# Altium PCB Board_QFP.PcbDoc (part 4 of 4)
Units mm, origin at the board's own origin, x right, y up, seen from the top; angles counter-clockwise.
Board outline 237 x 100 mm, 2 copper layers (Top Layer, Bottom Layer); 389 components, 358 nets, 1412 pads, 469 vias.
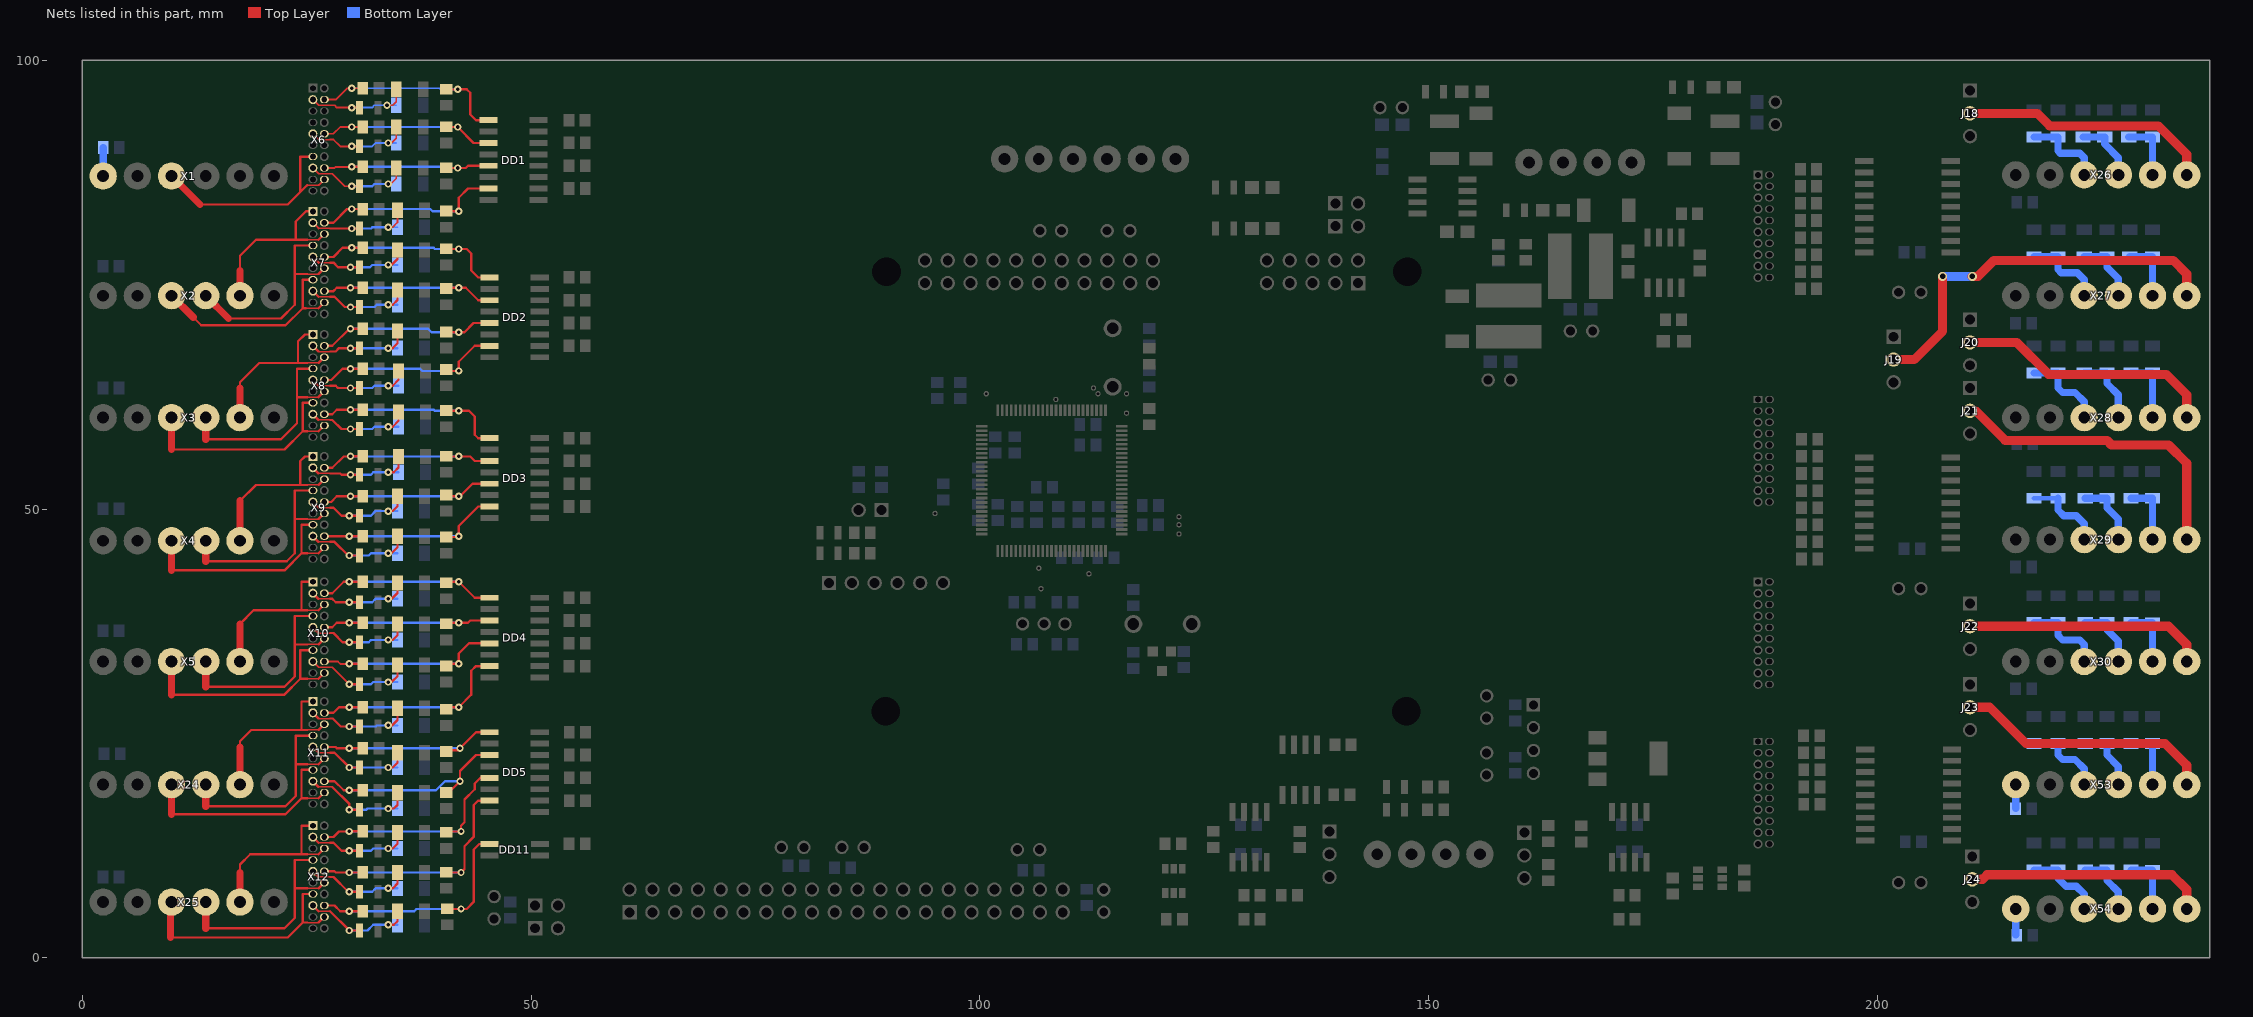
[diagram p4: the nets of this part, all layers, seen from the top]

## Via types
v1: diameter 0.6, hole 0.3, Top Layer to Bottom Layer, 149 vias
v2: diameter 0.813, hole 0.406, Top Layer to Bottom Layer, 130 vias
v3: diameter 1, hole 0.6, Top Layer to Bottom Layer, 118 vias
v4: diameter 1.016, hole 0.61, Top Layer to Bottom Layer, 72 vias

## Nets (pads, with @x,y where several pads share a name; then routed paths per layer and width w, separated by ;. In a path a pad name is that pad's centre, name@x,y a point inside that pad or via, vN(x,y) a via of type N, cw(c..) or ccw(c..) an arc to the next point about the centre after c; other vN are vias at no path point) (continued)
x1-4: X1.4 X6.13 X6.18 | length 24.8
  Top Layer w0.152: 25.04,86.111 26.31,86.111
  Top Layer w0.203: 26.31,86.111 X6.18@26.945,86.746
  Top Layer w0.254: 13.102,83.952 22.881,83.952 24.278,85.349 ; 25.04,86.111 24.278,85.349 ; X6.13@25.675,89.286 24.278,89.286 24.278,85.349
  Top Layer w0.813: X1.4@9.927,87.127 13.102,83.952
x1-6: J1.2 X1.6 | length 3.2
  Bottom Layer w0.813: X1.6@2.31,87.13 J1.2@2.31,90.304
x2-2: X2.2 X7.1 X7.6 | length 19.3
  Top Layer w0.152: 25.04,80.015 26.31,80.015
  Top Layer w0.254: 17.547,76.586 17.547,78.237 19.325,80.015 23.77,80.015 ; 25.04,80.015 23.77,80.015 ; X7.1@25.675,83.19 24.913,83.19 23.77,82.047 23.77,80.015 ; 26.31,80.015 X7.6@26.945,80.65
  Top Layer w0.813: X2.2@17.547,73.792 17.547,76.586
x2-3: X2.3 X7.7 X7.12 | length 23.8
  Top Layer w0.152: 25.04,76.205 26.31,76.205
  Top Layer w0.254: 16.277,71.252 22.119,71.252 23.643,72.776 23.643,76.205 ; 25.04,76.205 23.643,76.205 ; X7.7@25.675,79.38 23.643,79.38 23.643,76.205 ; 26.31,76.205 X7.12@26.945,76.84
  Top Layer w0.813: X2.3@13.737,73.792 16.277,71.252
x2-4: X2.4 X7.13 X7.18 | length 23.8
  Top Layer w0.152: 24.913,72.395 26.31,72.395
  Top Layer w0.254: 12.34,71.379 13.229,70.49 22.627,70.49 24.532,72.395 ; 24.913,72.395 24.532,72.395 ; X7.13@25.675,75.57 24.532,75.57 24.532,72.395 ; 26.31,72.395 X7.18@26.945,73.03
  Top Layer w0.813: X2.4@9.927,73.792 12.34,71.379
x3-2: X3.2 X8.1 X8.6 | length 18.9
  Top Layer w0.152: 25.04,66.299 26.31,66.299
  Top Layer w0.254: 17.547,63.505 17.547,64.14 19.706,66.299 24.024,66.299 ; 25.04,66.299 24.024,66.299 ; X8.1@25.675,69.474 24.786,69.474 24.024,68.712 24.024,66.299 ; 26.31,66.299 X8.6@26.945,66.934
  Top Layer w0.813: X3.2@17.547,60.203 17.547,63.505
x3-3: X3.3 X8.7 X8.12 | length 24.5
  Top Layer w0.152: 25.04,62.489 26.31,62.489
  Top Layer w0.254: 13.737,57.79 22.119,57.79 23.897,59.568 23.897,62.489 ; 25.04,62.489 23.897,62.489 ; X8.7@25.675,65.664 23.897,65.664 23.897,62.489 ; 26.31,62.489 X8.12@26.945,63.124
  Top Layer w0.813: 13.737,57.79 X3.3@13.737,60.203
x3-4: X3.4 X8.13 X8.18 | length 26
  Top Layer w0.152: 25.04,58.679 26.31,58.679
  Top Layer w0.254: 9.927,56.647 22.5,56.647 24.532,58.679 ; 25.04,58.679 24.532,58.679 ; X8.13@25.675,61.854 24.532,61.854 24.532,58.679 ; 26.31,58.679 X8.18@26.945,59.314
  Top Layer w0.813: 9.927,56.647 X3.4@9.927,60.203
x4-2: X4.2 X9.1 X9.6 | length 19.1
  Top Layer w0.152: 25.04,52.71 26.31,52.71
  Top Layer w0.254: 17.547,50.932 19.325,52.71 24.278,52.71 ; 25.04,52.71 24.278,52.71 ; X9.1@25.675,55.885 24.786,55.885 24.278,55.377 24.278,52.71 ; 26.31,52.71 X9.6@26.945,53.345
  Top Layer w0.813: X4.2@17.547,46.487 17.547,50.932
x4-3: X4.3 X9.7 X9.12 | length 25.1
  Top Layer w0.152: 25.04,48.9 26.31,48.9
  Top Layer w0.254: 13.737,44.201 22.754,44.201 23.643,45.09 23.643,48.9 ; 25.04,48.9 23.643,48.9 ; X9.7@25.675,52.075 23.643,52.075 23.643,48.9 ; 26.31,48.9 X9.12@26.945,49.535
  Top Layer w0.813: 13.737,44.201 X4.3@13.737,46.487
x4-4: X4.4 X9.13 X9.18 | length 25.8
  Top Layer w0.152: 25.04,45.09 26.31,45.09
  Top Layer w0.254: 9.927,43.185 22.5,43.185 24.405,45.09 ; 25.04,45.09 24.405,45.09 ; X9.13@25.675,48.265 24.405,48.265 24.405,45.09 ; 26.31,45.09 X9.18@26.945,45.725
  Top Layer w0.813: 9.927,43.185 X4.4@9.927,46.487
x5-2: X5.2 X10.1 X10.6 | length 18.9
  Top Layer w0.152: 25.04,38.74 26.31,38.74
  Top Layer w0.254: 17.547,37.216 19.071,38.74 24.405,38.74 ; 25.04,38.74 24.405,38.74 ; X10.1@25.675,41.915 24.405,41.915 24.405,38.74 ; 26.31,38.74 X10.6@26.945,39.375
  Top Layer w0.813: X5.2@17.547,33.025 17.547,37.216
x5-3: X5.3 X10.7 X10.12 | length 25.5
  Top Layer w0.152: 25.04,34.93 26.31,34.93
  Top Layer w0.254: 13.737,30.231 22.5,30.231 23.643,31.374 23.643,34.93 ; 25.04,34.93 23.643,34.93 ; X10.7@25.675,38.105 23.643,38.105 23.643,34.93 ; 26.31,34.93 X10.12@26.945,35.565
  Top Layer w0.813: 13.737,30.231 X5.3@13.737,33.025
x5-4: X5.4 X10.13 X10.18 | length 26.3
  Top Layer w0.152: 25.04,31.12 26.31,31.12
  Top Layer w0.254: 9.927,29.342 22.5,29.342 24.278,31.12 ; 25.04,31.12 24.278,31.12 ; X10.13@25.675,34.295 24.278,34.295 24.278,31.12 ; 26.31,31.12 X10.18@26.945,31.755
  Top Layer w0.813: 9.927,29.342 X5.4@9.927,33.025
x6-3: R2.1 R3.1 VD1.1 X6.3 | length 13.4
  Top Layer w0.152: 26.31,95.001 27.58,95.001
  Top Layer w0.203: X6.3@25.675,95.636 26.31,95.001 ; 27.58,95.001 28.088,95.001 28.342,94.747 v2(29.993,94.747) VD1.1@30.882,94.747 VD1.1@31.009,94.747 ; v2(33.93,95.001) 34.565,95.001 34.97,95.406 R3.1@34.97,96.779
  Bottom Layer w0.203: v2(29.993,94.747) 32.279,94.747 32.533,95.001 v2(33.93,95.001) R2.1@34.97,95.001
x6-4: DD1.1 R1.1 R4.1 X6.4 | length 24.2
  Top Layer w0.203: X6.4@26.945,95.636 28.215,95.636 29.485,96.906 v2(29.993,96.906) 31.236,96.906 R1.1@31.238,96.908 ; R4.1@40.561,96.779 v2(41.804,96.779)
  Top Layer w0.254: v2(41.804,96.779) 42.82,96.779 43.201,96.398 43.201,93.985 43.836,93.35 DD1.1@45.233,93.35
  Bottom Layer w0.203: v2(29.993,96.906) 39.772,96.906 39.899,96.779 41.169,96.779 41.167,96.781 41.802,96.781 v2(41.804,96.779)
x7-3: R6.1 R7.1 VD2.1 X6.9 | length 13.4
  Top Layer w0.152: 26.31,91.191 27.58,91.191
  Top Layer w0.203: X6.9@25.675,91.826 26.31,91.191 ; 27.58,91.191 27.961,91.191 28.723,90.429 v2(29.993,90.429) VD2.1@30.882,90.429 ; VD2.1@30.882,90.556 VD2.1@31.009,90.556 ; v2(34.057,90.81) 34.438,90.81 34.97,91.342 R7.1@34.97,92.588
  Bottom Layer w0.203: v2(29.993,90.429) 32.279,90.429 32.66,90.81 v2(34.057,90.81) R6.1@34.97,90.81
x7-4: DD1.3 R5.1 R8.1 X6.10 | length 22
  Top Layer w0.203: X6.10@26.945,91.826 27.961,91.826 28.723,92.588 v2(29.993,92.588)
  Top Layer w0.254: v2(29.993,92.588) 31.236,92.588 R5.1@31.238,92.59 R5.1@31.365,92.59 ; R8.1@40.561,92.588 v2(41.804,92.588) 43.582,90.81 DD1.3@45.233,90.81
  Bottom Layer w0.254: v2(29.993,92.588) v2(41.804,92.588)
x8-3: R10.1 R11.1 VD3.1 X6.15 | length 12.6
  Top Layer w0.152: 26.31,87.381 27.58,87.381
  Top Layer w0.203: X6.15@25.675,88.016 26.31,87.381 ; 27.58,87.381 27.834,87.381 29.231,85.984 v2(29.993,85.984) VD3.1@30.882,85.984 ; v2(34.057,86.238) 34.359,86.238 34.97,86.849 R10.1@34.97,88.016
  Bottom Layer w0.254: v2(29.993,85.984) 32.279,85.984 32.533,86.238 v2(34.057,86.238)
x8-4: DD1.5 R9.1 R12.1 X6.16 | length 21
  Top Layer w0.203: X6.16@26.945,88.016 28.088,88.016 28.215,88.143 v2(29.993,88.143)
  Top Layer w0.254: v2(29.993,88.143) 29.995,88.145 R9.1@31.238,88.145 ; R12.1@40.561,88.016 v2(41.804,88.016) 42.693,88.016 42.947,88.27 DD1.5@45.233,88.27
  Bottom Layer w0.254: v2(29.993,88.143) 40.026,88.143 40.153,88.016 v2(41.804,88.016)
x9-3: R17.1 R18.1 VD4.1 X7.3 | length 13.3
  Top Layer w0.152: 26.31,81.285 27.58,81.285
  Top Layer w0.203: X7.3@25.675,81.92 26.31,81.285 ; v2(29.993,81.285) VD4.1@30.882,81.285 ; v2(34.057,81.412) 34.565,81.412 35.097,81.944 R17.1@35.097,83.317
  Top Layer w0.254: 27.58,81.285 v2(29.993,81.285)
  Bottom Layer w0.203: v2(34.057,81.412) R18.1@35.097,81.412
  Bottom Layer w0.254: v2(29.993,81.285) 32.152,81.285 32.279,81.412 v2(34.057,81.412)
x9-4: DD1.7 R16.1 R19.1 X7.4 | length 23.6
  Top Layer w0.254: X7.4@26.945,81.92 27.961,81.92 29.485,83.444 v2(29.993,83.444) 29.995,83.446 R16.1@31.238,83.446 ; R19.1@40.561,83.19 v2(41.931,83.19) 41.931,84.714 42.947,85.73 DD1.7@45.233,85.73
  Bottom Layer w0.254: v2(29.993,83.444) 38.756,83.444 39.01,83.19 v2(41.931,83.19)
x10-3: R21.1 R22.1 VD5.1 X7.9 | length 13.3
  Top Layer w0.152: 26.31,77.475 27.58,77.475
  Top Layer w0.254: X7.9@25.675,78.11 26.31,77.475 ; 27.58,77.475 27.961,77.475 28.469,76.967 v2(29.866,76.967) VD5.1@30.882,76.967 ; v2(34.057,77.221) 34.438,77.221 35.097,77.88 R21.1@35.097,78.872
  Bottom Layer w0.254: v2(29.866,76.967) 32.025,76.967 32.279,77.221 v2(34.057,77.221) R22.1@35.097,77.221
x10-4: DD2.1 R20.1 R23.1 X7.10 | length 23.9
  Top Layer w0.203: R23.1@40.561,78.999 v2(41.931,78.999)
  Top Layer w0.254: X7.10@26.945,78.11 27.961,78.11 28.977,79.126 v2(29.993,79.126) 29.995,79.128 R20.1@31.238,79.128 ; v2(41.931,78.999) 42.82,78.999 43.328,78.491 43.328,76.586 44.09,75.824 DD2.1@45.36,75.824
  Bottom Layer w0.254: v2(29.993,79.126) 39.137,79.126 39.264,78.999 v2(41.931,78.999)
x11-3: R25.1 R26.1 VD6.1 X7.15 | length 13.7
  Top Layer w0.152: 26.31,73.665 27.58,73.665
  Top Layer w0.254: X7.15@25.675,74.3 26.31,73.665 ; 27.58,73.665 28.088,73.665 29.231,72.522 v2(29.866,72.522) VD6.1@30.882,72.522 ; v2(34.057,72.776) 34.565,72.776 35.097,73.308 R25.1@35.097,74.427
  Bottom Layer w0.254: v2(29.866,72.522) 32.533,72.522 32.787,72.776 v2(34.057,72.776) R26.1@35.097,72.776
x11-4: DD2.3 R24.1 R27.1 X7.16 | length 22
  Top Layer w0.254: X7.16@26.945,74.3 27.961,74.3 28.342,74.681 v2(29.866,74.681) 29.868,74.683 R24.1@31.238,74.683 ; R27.1@40.536,74.579 40.638,74.681 v2(41.931,74.681) 42.693,74.681 44.09,73.284 DD2.3@45.36,73.284
  Bottom Layer w0.254: v2(29.866,74.681) v2(41.931,74.681)
x12-3: R32.1 R33.1 VD7.1 X8.3 | length 13.5
  Top Layer w0.152: 26.31,67.569 27.58,67.569
  Top Layer w0.254: X8.3@25.675,68.204 26.31,67.569 ; 27.58,67.569 28.215,67.569 28.596,67.95 v2(29.866,67.95) VD7.1@30.882,67.95 ; v2(34.057,67.95) 34.565,67.95 35.097,68.482 R32.1@35.097,69.855
  Bottom Layer w0.254: v2(29.866,67.95) v2(34.057,67.95) R33.1@35.097,67.95
x12-4: DD2.5 R31.1 R34.1 X8.4 | length 22.5
  Top Layer w0.254: X8.4@26.945,68.204 27.834,68.204 29.739,70.109 v2(29.866,70.109) 29.868,70.111 R31.1@31.238,70.111 ; R34.1@40.561,69.728 v2(41.931,69.728) 42.566,69.728 43.582,70.744 DD2.5@45.36,70.744
  Bottom Layer w0.254: v2(29.866,70.109) 38.502,70.109 38.883,69.728 v2(41.931,69.728)
x13-3: R36.1 R37.1 VD8.1 X8.9 | length 13.5
  Top Layer w0.152: 26.31,63.759 27.58,63.759
  Top Layer w0.254: X8.9@25.675,64.394 26.31,63.759 ; 27.58,63.759 28.215,63.759 28.469,63.505 v2(29.866,63.505) VD8.1@30.882,63.505 ; v2(34.057,63.759) 34.565,63.759 35.224,64.418 R36.1@35.224,65.41
  Bottom Layer w0.254: v2(29.866,63.505) 32.279,63.505 32.533,63.759 v2(34.057,63.759) R37.1@35.224,63.759
x13-4: DD2.7 R35.1 R38.1 X8.10 | length 23.6
  Top Layer w0.254: X8.10@26.945,64.394 27.707,64.394 28.977,65.664 v2(29.866,65.664) 29.868,65.666 R35.1@31.238,65.666 ; R38.1@40.536,65.562 40.688,65.41 v2(41.931,65.41) 41.931,66.426 43.709,68.204 DD2.7@45.36,68.204
  Bottom Layer w0.254: v2(29.866,65.664) 37.613,65.664 37.867,65.41 v2(41.931,65.41)
x14-3: R40.1 R41.1 VD9.1 X8.15 | length 13.8
  Top Layer w0.152: 26.31,59.949 27.58,59.949
  Top Layer w0.254: X8.15@25.675,60.584 26.31,59.949 ; 27.58,59.949 27.834,59.949 28.85,58.933 v2(29.866,58.933) VD9.1@30.882,58.933 ; v2(34.057,59.187) 34.565,59.187 35.224,59.846 R40.1@35.224,60.838
  Bottom Layer w0.254: v2(29.866,58.933) 32.279,58.933 32.533,59.187 v2(34.057,59.187) R41.1@35.224,59.187
x14-4: DD3.1 R39.1 R42.1 X8.16 | length 23.9
  Top Layer w0.254: X8.16@26.945,60.584 27.834,60.584 28.342,61.092 v2(29.866,61.092) 29.868,61.094 R39.1@31.238,61.094 ; R42.1@40.561,60.965 v2(41.931,60.965) 43.074,60.965 43.709,60.33 43.709,58.298 44.09,57.917 DD3.1@45.36,57.917
  Bottom Layer w0.254: v2(29.866,61.092) 39.137,61.092 39.264,60.965 v2(41.931,60.965)
x15-3: R47.1 R48.1@35.224,54.107 VD10.1 X9.3 | length 13.6
  Top Layer w0.152: 26.31,53.98 27.58,53.98
  Top Layer w0.254: X9.3@25.675,54.615 26.31,53.98 ; 27.58,53.98 28.723,53.98 28.85,53.853 v2(29.866,53.853) VD10.1@30.882,53.853 ; v2(34.057,54.107) 34.692,54.107 35.224,54.639 R47.1@35.224,55.885
  Bottom Layer w0.254: v2(29.866,53.853) 32.152,53.853 32.406,54.107 v2(34.057,54.107) R48.1@35.224,54.107
x15-4: DD3.3 R46.1 R49.1 X9.4 | length 21.9
  Top Layer w0.254: X9.4@26.945,54.615 27.834,54.615 29.104,55.885 v2(29.866,55.885) 29.868,55.887 R46.1@31.238,55.887 ; R49.1@40.536,55.91 40.561,55.885 v2(41.931,55.885) 43.201,55.885 43.709,55.377 DD3.3@45.36,55.377
  Bottom Layer w0.254: v2(29.866,55.885) v2(41.931,55.885)
x16-3: R51.1 R52.1 VD11.1 X9.9 | length 13.8
  Top Layer w0.152: 26.31,50.17 27.58,50.17
  Top Layer w0.254: X9.9@25.675,50.805 26.31,50.17 ; 27.58,50.17 27.961,50.17 28.85,49.281 v2(29.739,49.281) VD11.1@30.882,49.281 ; v2(34.057,49.789) 34.565,49.789 35.097,50.321 R51.1@35.097,51.44
  Bottom Layer w0.254: v2(29.739,49.281) 32.152,49.281 32.66,49.789 v2(34.057,49.789) R52.1@35.097,49.789
x16-4: DD3.5 R50.1 R53.1 X9.10 | length 22
  Top Layer w0.254: X9.10@26.945,50.805 27.707,50.805 28.342,51.44 v2(29.866,51.44) 29.868,51.442 R50.1@31.238,51.442 ; R53.1@40.536,51.592 40.688,51.44 v2(41.931,51.44) ; v2@42.058,51.44 43.455,52.837 DD3.5@45.36,52.837
  Bottom Layer w0.254: v2(29.866,51.44) v2(41.931,51.44)
x17-3: R55.1 R56.1 VD12.1 X9.15 | length 14.1
  Top Layer w0.152: 26.31,46.36 27.58,46.36
  Top Layer w0.254: X9.15@25.675,46.995 26.31,46.36 ; 27.58,46.36 28.088,46.36 29.612,44.836 v2(29.739,44.836) VD12.1@30.882,44.836 ; v2(34.057,45.09) 34.438,45.09 35.097,45.749 R55.1@35.097,46.995
  Bottom Layer w0.254: v2(29.739,44.836) 31.898,44.836 32.152,45.09 v2(34.057,45.09) R56.1@35.097,45.09
x17-4: DD3.7 R54.1 R57.1 X9.16 | length 23.4
  Top Layer w0.254: X9.16@26.945,46.995 v2(29.739,46.995) 29.741,46.997 R54.1@31.238,46.997 ; R57.1@40.536,46.893 41.829,46.893 v2(41.931,46.995) 41.931,48.138 44.09,50.297 DD3.7@45.36,50.297
  Bottom Layer w0.254: v2(29.739,46.995) v2(41.931,46.995)
x18-3: R62.1 R63.1@35.097,40.01 VD13.1 X10.3 | length 13.6
  Top Layer w0.152: 26.31,40.01 27.58,40.01
  Top Layer w0.254: X10.3@25.675,40.645 26.31,40.01 ; 27.58,40.01 27.834,40.01 28.215,39.629 v2(29.739,39.629) VD13.1@30.882,39.629 ; v2(34.057,40.01) 34.438,40.01 35.097,40.669 R62.1@35.097,41.788
  Bottom Layer w0.254: v2(29.739,39.629) 32.279,39.629 32.66,40.01 v2(34.057,40.01) R63.1@35.097,40.01
x18-4: DD4.1 R61.1 R64.1 X10.4 | length 22.6
  Top Layer w0.254: X10.4@26.945,40.645 27.834,40.645 29.104,41.915 v2(29.739,41.915) 29.741,41.917 R61.1@31.238,41.917 ; R64.1@40.536,41.813 40.638,41.915 v2(41.931,41.915) 43.709,40.137 DD4.1@45.36,40.137
  Bottom Layer w0.254: v2(29.739,41.915) v2(41.931,41.915)
x19-3: R66.1 R67.1 VD14.1 X10.9 | length 13.9
  Top Layer w0.152: 26.31,36.2 27.58,36.2
  Top Layer w0.254: X10.9@25.675,36.835 26.31,36.2 ; 27.58,36.2 27.961,36.2 28.977,35.184 v2(29.739,35.184) VD14.1@30.882,35.184 ; v2(34.057,35.438) 34.565,35.438 35.097,35.97 R66.1@35.097,37.216
  Bottom Layer w0.254: v2(29.739,35.184) 31.898,35.184 32.152,35.438 v2(34.057,35.438) R67.1@35.097,35.438
x19-4: DD4.3 R65.1 R68.1 X10.10 | length 21.7
  Top Layer w0.254: X10.10@26.945,36.835 27.834,36.835 28.342,37.343 v2(29.739,37.343) 29.741,37.345 R65.1@31.238,37.345 ; R68.1@40.536,37.241 40.638,37.343 v2(41.931,37.343) 42.947,37.343 43.201,37.597 DD4.3@45.36,37.597
  Bottom Layer w0.254: v2(29.739,37.343) v2(41.931,37.343)
x20-3: R70.1 R71.1 VD15.1 X10.15 | length 14.3
  Top Layer w0.152: 26.31,32.39 27.58,32.39
  Top Layer w0.203: X10.15@25.675,33.025 26.31,32.39 ; 27.58,32.39 27.834,32.39 v2(29.739,30.485)
  Top Layer w0.254: v2(29.739,30.485) VD15.1@30.882,30.485 ; v2(34.057,30.739) 34.438,30.739 35.097,31.398 R70.1@35.097,32.644
  Bottom Layer w0.254: v2(29.739,30.485) 32.152,30.485 32.406,30.739 v2(34.057,30.739) R71.1@35.097,30.739
x20-4: DD4.5 R69.1 R72.1 X10.16 | length 23.1
  Top Layer w0.203: X10.16@26.945,33.025 28.469,33.025 28.723,32.771 v2(29.739,32.771)
  Top Layer w0.254: v2(29.739,32.771) 29.741,32.773 R69.1@31.238,32.773 ; R72.1@40.536,32.542 40.765,32.771 v2(41.931,32.771) 41.931,33.914 43.074,35.057 DD4.5@45.36,35.057
  Bottom Layer w0.254: v2(29.739,32.771) v2(41.931,32.771)
x24-2: X11.1 X11.6 X24.2 | length 19.5
  Top Layer w0.152: 25.04,25.405 26.31,25.405
  Top Layer w0.254: 17.547,23.5 17.547,24.135 18.817,25.405 24.405,25.405 ; 25.04,25.405 24.405,25.405 ; X11.1@25.675,28.58 24.405,28.58 24.405,25.405 ; 26.31,25.405 X11.6@26.945,26.04
  Top Layer w0.813: X24.2@17.547,19.309 17.547,23.5
x24-3: X11.7 X11.12 X24.3 | length 25
  Top Layer w0.152: 25.04,21.595 26.31,21.595
  Top Layer w0.254: 13.737,16.896 22.627,16.896 23.77,18.039 23.77,21.595 ; 25.04,21.595 23.77,21.595 ; X11.7@25.675,24.77 23.77,24.77 23.77,21.595 ; 26.31,21.595 X11.12@26.945,22.23
  Top Layer w0.813: 13.737,16.896 X24.3@13.737,19.309
x24-4: X11.13 X11.18 X24.4 | length 25.8
  Top Layer w0.152: 25.04,17.785 26.31,17.785
  Top Layer w0.254: 9.927,16.007 22.627,16.007 24.405,17.785 ; 25.04,17.785 24.405,17.785 ; X11.13@25.675,20.96 24.405,20.96 24.405,17.785 ; 26.31,17.785 X11.18@26.945,18.42
  Top Layer w0.813: 9.927,16.007 X24.4@9.927,19.309
x25-2: X12.1 X12.6 X25.2 | length 18.8
  Top Layer w0.152: 25.04,11.562 26.31,11.562
  Top Layer w0.254: 17.547,9.53 17.547,10.419 18.69,11.562 24.405,11.562 ; 25.04,11.562 24.405,11.562 ; X12.1@25.675,14.737 24.405,14.737 24.405,11.562 ; 26.31,11.562 X12.6@26.945,12.197
  Top Layer w0.813: X25.2@17.547,6.228 17.547,9.53
x25-3: X12.7 X12.12 X25.3 | length 25.4
  Top Layer w0.152: 25.04,7.752 26.31,7.752
  Top Layer w0.254: 13.737,3.307 22.5,3.307 23.643,4.45 23.643,7.752 ; 25.04,7.752 23.643,7.752 ; X12.7@25.675,10.927 23.643,10.927 23.643,7.752 ; 26.31,7.752 X12.12@26.945,8.387
  Top Layer w0.813: 13.737,3.307 X25.3@13.737,6.228
x25-4: X12.13 X12.18 X25.4 | length 26.2
  Top Layer w0.152: 25.04,3.942 26.31,3.942
  Top Layer w0.254: 9.8,2.291 22.881,2.291 24.532,3.942 ; 25.04,3.942 24.532,3.942 ; X12.13@25.675,7.117 24.532,7.117 24.532,3.942 ; 26.31,3.942 X12.18@26.945,4.577
  Top Layer w0.813: 9.8,2.291 X25.4@9.8,6.101
x26-1: J18.2 X26.1 | length 28.3
  Top Layer w1.016: J18.2@210.312,94.107 217.81,94.107 219.202,92.715 231.288,92.715 234.463,89.54 X26.1@234.463,87.254
x26-2: R77.1 R78.1 X26.2 | length 6.9
  Bottom Layer w0.813: R77.1@227.986,91.469 R78.1@230.653,91.469 X26.2@230.653,87.254
x26-3: R63.1@222.906,91.469 R94.1 X26.3 | length 7.3
  Bottom Layer w0.813: R63.1@222.906,91.469 R94.1@225.319,91.469 225.319,90.683 226.843,89.159 X26.3@226.843,87.254
x26-4: R95.1 R96.1 X26.4 | length 9.4
  Bottom Layer w0.813: R95.1@217.445,91.469 R96.1@220.112,91.469 220.112,89.921 220.366,89.667 222.525,89.667 223.033,89.159 X26.4@223.033,87.254
x27-1: J19.2 X27.1 | length 43.9
  Top Layer w1.016: J19.2@201.803,66.675 204.089,66.675 207.264,69.85 v3(207.264,75.946) ; v3(210.566,75.946) 211.201,75.946 212.984,77.729 232.939,77.729 234.463,76.205 X27.1@234.463,73.792
  Bottom Layer w1.016: v3(207.264,75.946) v3(210.566,75.946)
x27-2: R97.1 R98.1 X27.2 | length 6.9
  Bottom Layer w0.813: R97.1@228.113,78.134 R98.1@230.653,78.134 X27.2@230.653,73.792
x27-3: R132.1 R133.1 X27.3 | length 8.5
  Top Layer w0.813: X27.3@226.06,74.041 X27.3@226.822,73.279
  Bottom Layer w0.813: R133.1@223.033,78.134 R132.1@225.573,78.134 225.573,76.967 226.843,75.697 X27.3@226.843,73.792
x27-4: R101.1 R102.1 X27.4 | length 9.3
  Bottom Layer w0.813: R101.1@217.445,78.134 R102.1@220.112,78.134 220.112,76.713 220.493,76.332 222.271,76.332 223.033,75.57 X27.4@223.033,73.792
x28-1: J20.2 X28.1 | length 29.1
  Top Layer w1.016: J20.2@210.312,68.58 215.524,68.58 219.075,65.029 232.177,65.029 234.463,62.743 X28.1@234.463,60.203
x28-2: R103.1 R104.1 X28.2 | length 7.4
  Bottom Layer w0.813: R104.1@228.24,65.18 R103.1@230.653,65.18 X28.2@230.653,60.203
x28-3: R105.1 R106.1 X28.3 | length 8
  Bottom Layer w0.813: R106.1@223.033,65.18 R105.1@225.573,65.18 225.573,64.013 226.843,62.743 X28.3@226.843,60.203
x28-4: R107.1 R108.1 X28.4 | length 9.7
  Bottom Layer w0.813: R108.1@217.445,65.18 R107.1@220.112,65.18 220.112,63.505 220.62,62.997 222.017,62.997 223.033,61.981 X28.4@223.033,60.203
x29-1: J21.2 X29.1 | length 35.1
  Top Layer w1.016: J21.2@210.312,60.96 210.947,60.96 214.244,57.663 225.573,57.663 226.081,57.155 232.431,57.155 234.463,55.123 X29.1@234.463,46.614
x29-2: R109.1 R110.1 X29.2 | length 7
  Bottom Layer w0.813: R110.1@228.24,51.21 R109.1@230.653,51.21 X29.2@230.653,46.614
x29-3: R111.1 R112.1 X29.3 | length 7.5
  Bottom Layer w0.813: R112.1@223.16,51.21 R111.1@225.573,51.21 225.573,50.17 226.843,48.9 X29.3@226.843,46.614
x29-4: R113.1 R114.1 X29.4 | length 9.3
  Bottom Layer w0.508: R114.1@217.445,51.21 R113.1@220.112,51.21
  Bottom Layer w0.813: R113.1@220.112,51.21 220.112,49.916 220.747,49.281 222.144,49.281 223.033,48.392 X29.4@223.033,46.614
x30-1: J22.2 X30.1 | length 26.9
  Top Layer w1.016: J22.2@210.333,36.962 232.431,36.962 234.463,34.93 X30.1@234.463,33.025
x30-2: R115.1 R116.1 X30.2 | length 6.7
  Bottom Layer w0.813: R116.1@228.264,37.343 R115.1@230.653,37.343 X30.2@230.653,33.025
x30-3: R117.1 R118.1 X30.3 | length 7.3
  Bottom Layer w0.813: R118.1@223.16,37.367 R117.1@225.573,37.367 225.573,36.581 226.843,35.311 X30.3@226.843,33.025
x30-4: R119.1 R120.1 X30.4 | length 9.3
  Bottom Layer w0.813: R120.1@217.445,37.367 R119.1@220.112,37.367 220.112,35.946 220.62,35.438 222.525,35.438 223.033,34.93 X30.4@223.033,33.025
x53-1: J23.2 X53.1 | length 29
  Top Layer w1.016: J23.2@210.312,27.94 212.497,27.94 216.556,23.881 232.05,23.881 234.463,21.468 X53.1@234.463,19.309
x53-2: R134.1 R135.1 X53.2 | length 7
  Bottom Layer w0.813: R135.1@228.24,23.905 R134.1@230.653,23.905 X53.2@230.653,19.309
x53-3: R136.1 R159.1 X53.3 | length 7.5
  Bottom Layer w0.813: R159.1@223.16,23.905 R136.1@225.573,23.905 225.573,22.611 226.843,21.341 X53.3@226.843,19.309
x53-4: R160.1 R161.1 X53.4 | length 9.3
  Bottom Layer w0.813: R161.1@217.445,23.905 R160.1@220.112,23.905 220.112,22.611 220.62,22.103 222.017,22.103 223.033,21.087 X53.4@223.033,19.309
x53-6: J16.1 X53.6 | length 2.9
  Bottom Layer w0.813: J16.1@215.413,16.665 X53.6@215.413,19.309 X53.6@215.413,19.563
x54-1: J24.2 X54.1 | length 26.9
  Top Layer w1.016: J24.2@210.571,8.768 211.709,8.768 212.217,9.276 232.812,9.276 234.463,7.625 X54.1@234.463,5.466
x54-2: R162.1 R163.1 X54.2 | length 6.7
  Bottom Layer w0.813: R163.1@228.264,9.784 R162.1@230.653,9.784 X54.2@230.653,5.466
x54-3: R164.1 R165.1 X54.3 | length 7.3
  Bottom Layer w0.813: R165.1@223.16,9.808 R164.1@225.573,9.808 225.573,8.641 226.843,7.371 X54.3@226.843,5.466
x54-4: R166.1 R167.1 X54.4 | length 8.9
  Bottom Layer w0.813: R167.1@217.445,9.808 R166.1@220.112,9.808 220.112,8.895 221.001,8.006 222.144,8.006 223.033,7.117 X54.4@223.033,5.466
x54-6: J17.1 X54.6 | length 2.9
  Bottom Layer w0.813: J17.1@215.413,2.568 X54.6@215.413,5.466
x61-3: R174.1 R175.1 VD16.1 X11.3 | length 13.8
  Top Layer w0.152: 26.31,26.675 27.58,26.675
  Top Layer w0.254: X11.3@25.675,27.31 26.31,26.675 ; 27.58,26.675 27.898,26.675 28.787,25.786 v2(29.739,25.786) VD16.1@30.882,25.786 ; v2(34.057,25.913) 34.486,25.913 35.097,26.524 R174.1@35.097,27.818
  Bottom Layer w0.254: v2(29.739,25.786) 32.66,25.786 32.787,25.913 v2(34.057,25.913) R175.1@35.097,25.913
x61-4: DD4.7 R173.1 R176.1 X11.4 | length 25.1
  Top Layer w0.254: X11.4@26.945,27.31 27.961,27.31 28.596,27.945 v2(29.739,27.945) 29.741,27.947 R173.1@31.238,27.947 ; R176.1@40.536,27.716 40.765,27.945 v2(41.931,27.945) 43.328,29.342 43.328,32.009 43.836,32.517 DD4.7@45.36,32.517
  Bottom Layer w0.254: v2(29.739,27.945) v2(41.931,27.945)
x62-3: R177.1 R178.1 VD17.1 X11.9 | length 13.9
  Top Layer w0.152: 26.31,22.865 27.58,22.865
  Top Layer w0.254: X11.9@25.675,23.5 26.31,22.865 ; 27.58,22.865 28.088,22.865 v2(29.739,21.214) VD17.1@30.882,21.214 ; v2(34.057,21.214) 34.565,21.214 35.097,21.746 R177.1@35.097,22.865
  Bottom Layer w0.254: v2(29.739,21.214) v2(34.057,21.214) R178.1@35.097,21.214
x62-4: DD5.1 R179.1 R180.1 X11.10 | length 22.3
  Top Layer w0.254: X11.10@26.945,23.5 28.215,23.5 28.342,23.373 v2(29.739,23.373) 29.741,23.375 R179.1@31.238,23.375 ; R180.1@40.536,23.144 41.829,23.144 v2(42.058,23.373) 43.836,25.151 DD5.1@45.36,25.151
  Bottom Layer w0.254: v2(29.739,23.373) v2(42.058,23.373)
x63-3: R181.1 R182.1 VD18.1 X11.15 | length 14.9
  Top Layer w0.152: 26.31,19.055 27.834,19.055
  Top Layer w0.254: X11.15@25.675,19.69 26.31,19.055 ; 27.834,19.055 29.739,17.15 v2(29.739,16.515) VD18.1@30.882,16.515 ; v2(34.057,16.642) 34.692,16.642 35.097,17.047 R182.1@35.097,18.42
  Bottom Layer w0.254: v2(29.739,16.515) 31.644,16.515 31.771,16.642 v2(34.057,16.642) R181.1@35.097,16.642
x63-4: DD5.3 R183.1 R184.1 X11.16 | length 24.7
  Top Layer w0.254: X11.16@26.945,19.69 28.088,19.69 29.104,18.674 v2(29.739,18.674) 29.741,18.676 R183.1@31.238,18.676 ; R184.1@40.561,18.42 R184.1@40.536,18.445 40.813,18.445 v2(42.058,19.69) 42.058,20.833 43.836,22.611 DD5.3@45.36,22.611
  Bottom Layer w0.254: v2(29.739,18.674) 39.391,18.674 40.407,19.69 v2(42.058,19.69)
x64-3: R185.1 R186.1 VD19.1 X12.3 | length 13.8
  Top Layer w0.152: 26.31,12.832 27.58,12.832
  Top Layer w0.254: X12.3@25.675,13.467 26.31,12.832 ; 27.58,12.832 27.961,12.832 28.85,11.943 v2(29.739,11.943) VD19.1@30.882,11.943 ; v2(34.057,12.197) 34.565,12.197 35.097,12.729 R185.1@35.097,13.975
  Bottom Layer w0.254: v2(29.739,11.943) 32.152,11.943 32.406,12.197 v2(34.057,12.197) R186.1@35.097,12.197
x64-4: DD5.5 R187.1 R188.1 X12.4 | length 26.4
  Top Layer w0.254: X12.4@26.945,13.467 27.961,13.467 28.596,14.102 v2(29.739,14.102) 29.741,14.104 R187.1@31.238,14.104 ; R188.1@40.638,14.102 v2(42.185,14.102) 42.185,14.737 42.566,15.118 42.566,17.658 43.709,18.801 43.709,19.436 44.344,20.071 DD5.5@45.36,20.071
  Bottom Layer w0.254: v2(29.739,14.102) v2(42.185,14.102)
x65-3: R189.1 R190.1 VD20.1 X12.9 | length 14.2
  Top Layer w0.152: 26.31,9.022 27.58,9.022
  Top Layer w0.254: X12.9@25.675,9.657 26.31,9.022 ; 27.58,9.022 27.961,9.022 29.612,7.371 v2(29.739,7.371) VD20.1@30.882,7.371 ; v2(34.057,7.752) 34.565,7.752 35.097,8.284 R189.1@35.097,9.53
  Bottom Layer w0.254: v2(29.739,7.371) 32.279,7.371 32.66,7.752 v2(34.057,7.752) R190.1@35.097,7.752
x65-4: DD5.7 R191.1 R192.1 X12.10 | length 28.5
  Top Layer w0.254: X12.10@26.945,9.657 28.088,9.657 28.215,9.53 v2(29.739,9.53) 29.741,9.532 R191.1@31.238,9.532 ; R192.1@40.561,9.53 v2(42.185,9.53) 42.566,9.911 42.566,12.451 43.582,13.467 43.582,17.023 44.09,17.531 DD5.7@45.36,17.531
  Bottom Layer w0.254: v2(29.739,9.53) v2(42.185,9.53)
x66-3: R193.1 R194.1 VD21.1 X12.15 | length 14.3
  Top Layer w0.152: 26.31,5.212 27.58,5.212
  Top Layer w0.254: X12.15@25.675,5.847 26.31,5.212 ; 27.58,5.212 v2(29.739,3.053) VD21.1@30.882,3.053 ; v2(34.057,3.688) 34.692,3.688 35.097,4.093 R193.1@35.097,5.212
  Bottom Layer w0.254: v2(29.739,3.053) 31.771,3.053 32.406,3.688 v2(34.057,3.688) R194.1@35.097,3.688
x66-4: DD11.1 R195.1 R196.1 X12.16 | length 28.2
  Top Layer w0.254: X12.16@26.945,5.847 28.088,5.847 28.723,5.212 v2(29.739,5.212) 29.741,5.214 R195.1@31.238,5.214 ; R196.1@40.688,5.466 v2(42.185,5.466) 42.82,5.466 43.582,6.228 43.582,12.07 44.217,12.705 DD11.1@45.354,12.705
  Bottom Layer w0.254: v2(29.739,5.212) 36.978,5.212 37.232,5.466 v2(42.185,5.466)
pads on no net: DA1.2 DA1.3 DA2.2 DA2.3 DD10.11 DD10.12 DD10.13 R183.2 VD18.2 X6.19 X6.20 X7.19 X7.20 X8.19 X8.20 X9.19 X9.20 X10.19 X10.20 X11.19 X11.20 X12.19 X12.20 X22.1 X31.19 X31.20 X32.19 X32.20 X33.13 X33.14 X33.17 X33.18 X33.19 X33.20 X34.15 X34.19 X34.20 X47.11 X47.12 X47.13 X47.14 X47.15 X47.16 X47.17 X47.18 X47.29 X47.30 X47.31 X47.32 X47.33 X47.34 X47.35 X47.36 X47.37 X47.38 X47.39 X47.40

## Polygon pours and split planes (outlines as drawn)
gnd on Bottom Layer "Bottom Layer-d2-14" (solid, pour order 86): 144.78,86.233 144.78,73.152 124.46,73.152 124.46,80.264 126.111,81.915 133.477,81.915 133.985,81.915 133.985,86.233
gnd on Bottom Layer "Bottom Layer-d2-14" (solid, pour order 84): 56.666,99.002 56.724,99.06 129.54,99.06 144.78,99.002 144.78,86.233 127.127,86.233 125.857,84.963 124.206,83.312 107.442,83.312 75.057,83.312 74.041,84.328 70.739,87.63 60.833,87.63 60.833,94.869 56.642,94.869
gnd on Bottom Layer "Bottom Layer-d2-14" (solid, pour order 76): 59.69,36.83 63.5,36.83 66.675,40.005 66.675,51.054 66.675,51.308 64.389,51.308 64.389,84.201 59.69,84.201
gnd on Bottom Layer "Bottom Layer-d2-14" (solid, pour order 74): 73.152,38.354 73.152,30.099 67.942,24.889 67.942,8.763 64.138,8.763 64.135,8.766 64.135,18.034 64.135,32.385 70.104,38.354 70.612,38.354
gnd on Bottom Layer "Bottom Layer-d2-14" (solid, pour order 70): 56.642,10.795 59.055,10.795 59.055,8.89 75.565,8.89 75.565,13.081 75.565,13.843 76.2,14.478 86.868,14.478 88.011,13.081 88.011,8.89 112.776,8.89 116.84,8.89 116.84,2.794 89.535,2.794 72.517,2.794 56.734,2.794 56.666,2.863
gnd on Bottom Layer "Bottom Layer-d2-14" (solid, pour order 66): 103.254,60.96 103.251,60.963 103.251,68.834 117.475,68.834 117.475,65.405 114.046,65.405 113.919,65.278 112.903,64.262 104.775,64.262 104.775,60.96
gnd on Bottom Layer "Bottom Layer-d2-14" (solid, pour order 60): 97.917,40.64 100.584,40.64 100.838,40.64 103.124,38.354 115.57,38.354 115.57,34.29 113.284,32.004 112.395,32.004 104.267,32.004 104.013,32.258 103.632,32.639 102.108,32.639 95.25,32.639 95.25,39.497 96.774,39.497
gnd on Bottom Layer "Bottom Layer-d2-14" (solid, pour order 56): 98.679,46.99 100.711,46.99 103.505,44.196 103.505,42.545 97.028,42.545 96.774,42.799 96.774,44.45 98.679,44.45
gnd on Bottom Layer "Bottom Layer-d2-14" (solid, pour order 54): 103.505,60.96 120.777,60.96 120.777,45.72 118.999,45.72 118.999,52.959 110.363,52.959 110.109,52.959 109.347,53.721 107.061,53.721 107.061,49.911 107.188,49.784 98.679,49.784 98.679,44.45 96.774,44.45 96.774,49.911 97.028,50.165 97.028,55.753 97.028,56.515 98.552,58.039 98.552,60.96
024v_1 on Bottom Layer "Bottom Layer-d2-14" (solid, pour order 50): 0.91,97.795 24.405,97.795 24.405,96.525 24.786,96.144 24.786,95.128 24.786,89.286 19.579,89.286 19.579,82.936 19.325,82.682 19.325,2.164 19.325,0.386 0.91,0.386
gnd on Bottom Layer "Mid-Layer 1, int1-No Net" (solid, pour order 20): 52.221,99.002 52.221,75.253 52.221,58.108 52.221,37.534 52.221,20.135 52.221,2.863 56.666,2.863 56.666,17.468 56.666,27.247 56.666,41.471 56.666,52.647 56.666,68.014 56.666,81.603 56.666,99.002
05V_1 on Bottom Layer "Bottom Layer-d2-14" (solid, pour order 90): 117.856,3.175 161.417,3.175 179.07,3.175 186.055,3.175 186.055,11.049 182.499,11.049 180.721,12.827 180.721,24.892 180.721,25.908 179.959,26.67 167.767,26.67 165.481,24.384 165.354,24.257 159.385,24.257 155.321,24.257 155.067,24.003 151.765,20.701 145.161,20.701 138.938,20.701 138.748,20.511 138.303,20.066 137.795,19.558 137.16,19.558 130.556,19.558 124.079,19.558 122.936,19.558 117.856,14.478
gnd on Bottom Layer "Bottom Layer-d2-14" (solid, pour order 92): 120.777,45.72 120.777,42.291 120.269,41.783 116.205,41.783 116.205,47.117 116.078,47.244 118.999,47.244 118.999,45.72
gnd on Bottom Layer "Bottom Layer-d2-14" (solid, pour order 100): 132.08,37.084 133.604,37.084 133.858,36.83 138.557,32.131 138.557,24.511 138.557,22.987 132.08,22.987
gnd on Bottom Layer "Bottom Layer-d2-14" (solid, pour order 104): 144.78,99.002 144.965,99.187 156.21,99.187 156.21,80.137 149.225,80.137 144.907,80.137 144.78,80.264
gnd on Bottom Layer "Bottom Layer-d2-14" (solid, pour order 106): 156.21,80.137 156.21,72.009 157.988,70.231 157.988,62.738 151.003,62.738 151.13,62.865 151.13,80.137
gnd on Bottom Layer "Bottom Layer-d2-14" (solid, pour order 108): 159.385,91.44 160.02,92.075 174.371,92.075 174.371,97.028 194.31,97.028 194.31,89.789 186.055,89.789 185.674,89.789 184.404,88.519 184.404,84.201 184.404,76.454 184.404,72.39 179.705,67.691 179.705,65.405 167.259,65.405 167.259,74.803 167.259,79.629 159.385,87.503
gnd on Bottom Layer "Bottom Layer-d2-14" (solid, pour order 110): 156.21,85.979 164.211,77.978 164.211,73.787 164.211,64.643 162.433,62.865 157.988,62.865 157.988,70.231 156.21,72.009
gnd on Bottom Layer "Bottom Layer-d2-14" (solid, pour order 112): 194.31,97.028 203.2,97.028 203.2,79.756 203.2,59.182 203.2,39.751 203.2,20.447 203.2,3.175 195.961,3.175 195.961,10.287 195.961,29.464 195.961,43.942 195.961,59.055 189.23,59.055 189.23,65.278 189.865,65.913 195.199,71.247 195.199,72.517 195.199,89.789 194.31,89.789
gnd on Bottom Layer "Bottom Layer-d2-14" (solid, pour order 114): 195.834,43.18 189.865,43.18 189.865,30.48 193.04,27.305 194.437,25.908 195.961,25.908 195.961,43.18
gnd on Bottom Layer "Bottom Layer-d2-14" (solid, pour order 116): 195.961,15.875 189.23,15.875 189.23,3.175 195.961,3.175
gnd on Bottom Layer "Bottom Layer-d2-14" (solid, pour order 120): 213.741,98.298 236.22,98.298 236.22,77.216 236.22,58.293 236.22,42.164 236.22,23.241 236.22,10.414 236.22,1.905 213.995,1.905 213.741,2.159
gnd on Bottom Layer "Bottom Layer-d2-14" (solid, pour order 126): 134.366,39.37 139.954,33.782 140.843,32.893 140.843,32.766 140.843,31.877 140.97,31.75 150.368,31.75 150.495,31.75 154.305,27.94 167.64,27.94 167.64,44.196 162.687,49.149 162.687,59.69 134.366,59.69
gnd on Bottom Layer "Bottom Layer-d2-14" (solid, pour order 128): 138.43,25.527 140.843,25.527 140.97,25.654 140.97,31.75 144.018,31.75 144.018,22.987 138.43,22.987 138.303,23.114
gnd on Bottom Layer "Bottom Layer-d2-14" (solid, pour order 130): 144.018,24.765 149.733,24.765 150.495,24.765 151.13,25.4 151.257,25.527 151.257,30.988 154.305,27.94 154.305,24.765 154.305,24.638 152.654,22.987 144.018,22.987
gnd on Bottom Layer "Bottom Layer-d2-14" (solid, pour order 132): 179.705,65.405 179.705,60.071 175.26,60.071 169.799,60.071 169.672,59.944 168.148,58.42 167.767,58.42 167.132,58.42 165.989,57.277 164.465,55.753 162.687,55.753 162.687,59.69 167.259,64.262 167.259,65.405
gnd on Bottom Layer "Bottom Layer-d2-14" (solid, pour order 136): 179.705,60.071 179.705,55.499 179.705,55.372 175.387,51.054 175.26,50.927 175.26,34.417 175.26,34.29 177.546,32.004 177.546,27.94 167.64,27.94 167.513,27.813 167.513,31.496 170.815,31.496 173.228,33.909 173.736,34.417 173.736,38.1 173.736,43.561 173.609,43.688 170.942,46.355 170.942,60.071
gnd on Top Layer "Bottom Layer-d2-14" (solid, pour order 82): 52.07,82.931 60.579,82.931 60.706,82.804 64.262,79.248 64.262,77.089 58.293,77.089 58.166,77.216 57.912,77.216 52.197,77.216
gnd on Top Layer "Bottom Layer-d2-14" (solid, pour order 80): 52.197,65.532 56.896,65.532 57.023,65.405 58.039,66.421 59.182,66.421 62.992,66.421 63.119,66.294 63.119,64.389 59.817,61.087 58.674,59.944 52.197,59.944
gnd on Top Layer "Bottom Layer-d2-14" (solid, pour order 78): 52.197,48.006 56.896,48.006 57.912,49.022 60.833,49.022 60.833,44.45 58.547,42.164 52.197,42.164
gnd on Top Layer "Bottom Layer-d2-14" (solid, pour order 72): 85.979,13.081 94.742,13.081 94.869,13.081 95.885,12.065 96.266,11.684 102.997,11.684 104.521,11.684 104.648,11.811 101.6,11.811 102.362,12.573 104.902,12.573 104.902,3.937 85.979,3.937
gnd on Top Layer "Bottom Layer-d2-14" (solid, pour order 68): 91.44,63.119 68.326,63.119 67.691,62.484 62.992,57.785 62.992,40.259 62.992,32.766 62.865,32.639 80.645,32.639 80.645,48.895 79.883,49.657 69.723,49.657 67.945,51.435 64.135,51.435 64.135,53.34 64.389,53.594 65.405,54.61 68.707,54.61 69.469,54.61 70.485,55.626 71.374,56.515 71.374,60.071 71.628,60.325 71.755,60.452 91.44,60.452
gnd on Top Layer "Bottom Layer-d2-14" (solid, pour order 62): 100.965,46.482 97.028,46.482 94.234,43.688 93.218,43.688 80.645,43.688 80.645,32.639 99.06,32.639 99.06,41.021 99.06,41.275 100.965,43.18
024v_1 on Top Layer "Bottom Layer-d2-14" (solid, pour order 52): 0.783,4.45 8.911,4.45 8.911,2.037 42.058,2.037 42.185,2.164 47.265,7.244 51.71,7.244 51.71,0.386 9.673,0.386 0.783,0.386
gnd on Top Layer "Bottom Layer-d2-14" (solid, pour order 94): 114.427,34.036 114.427,41.529 115.697,41.529 115.697,42.926 115.697,43.053 126.238,43.053 126.492,43.053 128.778,40.767 129.54,40.005 129.54,33.401 114.427,33.401
gnd on Top Layer "Bottom Layer-d2-14" (solid, pour order 96): 129.54,33.401 129.54,30.226 121.666,30.226 121.666,31.877 121.666,32.004 122.047,32.385 122.098,32.436 122.098,33.401
gnd on Top Layer "Bottom Layer-d2-14" (solid, pour order 98): 129.54,40.005 134.366,35.179 134.62,34.925 137.795,34.925 137.795,31.115 136.906,30.226 136.398,30.226 129.568,30.226 129.54,30.254
gnd on Top Layer "Bottom Layer-d2-14" (solid, pour order 118): 189.992,14.859 197.358,14.859 197.358,12.319 197.485,12.319 198.755,11.049 203.2,11.049 203.2,6.731 203.327,6.604 211.328,6.604 212.598,7.874 213.106,8.382 221.996,8.382 221.996,0.635 197.104,0.635 189.992,0.635
gnd on Top Layer "Bottom Layer-d2-14" (solid, pour order 122): 161.036,67.183 166.116,67.183 167.005,68.072 166.878,68.199 166.878,70.993 169.799,70.993 170.307,70.485 171.323,69.469 174.625,69.469 174.625,67.691 175.006,67.31 175.387,67.31 176.911,67.31 176.911,65.659 167.513,65.659 167.259,65.405 164.719,62.865 161.036,62.865
gnd on Top Layer "Bottom Layer-d2-14" (solid, pour order 124): 128.651,40.894 146.05,40.894 146.05,39.243 145.923,39.116 141.732,34.925 137.795,34.925 134.62,34.925
gnd on Top Layer "Bottom Layer-d2-14" (solid, pour order 134): 189.865,34.163 203.073,34.163 203.073,29.972 203.073,28.575 197.358,28.575 196.723,27.94 196.342,27.94 163.957,27.94 163.322,27.305 158.877,27.305 154.051,27.305 153.924,27.432 151.511,27.432 151.511,36.195 164.719,36.195 169.291,31.623 169.418,31.496 176.022,31.496 176.149,31.496 178.181,29.464 189.23,29.464 189.865,30.099

## Keep-outs
Keep-Out Layer:
  lines w0.15: 0,0 19,0 237,0 237,100 0,100 0,20 0,0

## Silkscreen, mask and mechanical layers (free items; w line width, h text height)
Top Overlay:
  lines w0.12: 127.381,12.065 132.842,12.065 132.842,14.351 132.207,14.986 127.381,14.986 127.381,12.065 ; 132.715,19.431 138.176,19.431 138.176,21.717 137.541,22.352 132.715,22.352 132.715,19.431 ; 150.114,82.169 150.114,87.249 153.035,87.249 153.035,82.677 152.527,82.169 152.4,82.169 150.114,82.169 ; 169.926,11.938 169.926,14.859 174.752,14.859 175.387,14.224 175.387,11.938 169.926,11.938 ; 200.406,45.085 206.375,45.085 206.375,56.896 201.041,56.896 200.406,56.261 200.406,45.085 ; 200.406,78.232 206.375,78.232 206.375,90.17 201.295,90.17 200.406,89.281 200.406,78.232 ; 200.66,12.7 206.375,12.7 206.375,24.511 201.549,24.511 200.66,23.622 200.66,12.7
  lines w0.15: 66.095,24.459 151.095,24.459 151.095,79.959 66.095,79.959 66.095,24.459
Mechanical 1:
  circle w0.15: c89.595,76.459 r3.5
  circle w0.15: c89.595,27.959 r3.5
  circle w0.15: c147.595,76.459 r3.5
  circle w0.15: c147.595,27.959 r3.5
  lines w0.1: 53.361,0.513 53.361,98.43
  lines w0.15: 0,2 237,2 ; 0,98 237,98 ; 140.737,75.189 143.785,75.189 ; 142.134,73.665 142.134,77.221 ; 145.182,76.459 149.881,76.459 ; 147.595,74.3 147.595,78.745

## Text inside footprints (layer, text, board x,y; h text height)
C2: Top Overlay "+" at 205.352,73.173 h0.7 r180
C3: Top Overlay "+" at 205.352,40.153 h0.7 r180
C6: Top Overlay "+" at 106.934,13.716 h0.7 r180
C7: Top Overlay "+" at 205.352,7.387 h0.7 r180
C10: Top Overlay "+" at 189.616,95.862 h0.7 r270
C12: Top Overlay "+" at 114.792,8.1 h0.7 r270
C17: Top Overlay "+" at 159.632,63.394 h0.7 r180
C19: Top Overlay "+" at 147.567,93.747 h0.7 r180
C21: Top Overlay "+" at 165.276,70.855 h0.7
C22: Top Overlay "+" at 80.772,13.97 h0.7 r180
C24: Top Overlay "+" at 155.459,26.211 h0.7 r90
C25: Top Overlay "+" at 155.459,19.861 h0.7 r90
C27: Top Overlay "+" at 84.102,13.319 h0.7
C51: Top Overlay "+" at 44.868,3.843 h0.7 r90